# Altium PCB PB10033E1.PcbDoc (part 2 of 2)
Units mm, origin at the board's own origin, x right, y up, seen from the top; angles counter-clockwise.
Board outline 75 x 46 mm, 2 copper layers (Top Layer, Bottom Layer); 199 components, 69 nets, 439 pads, 161 vias.
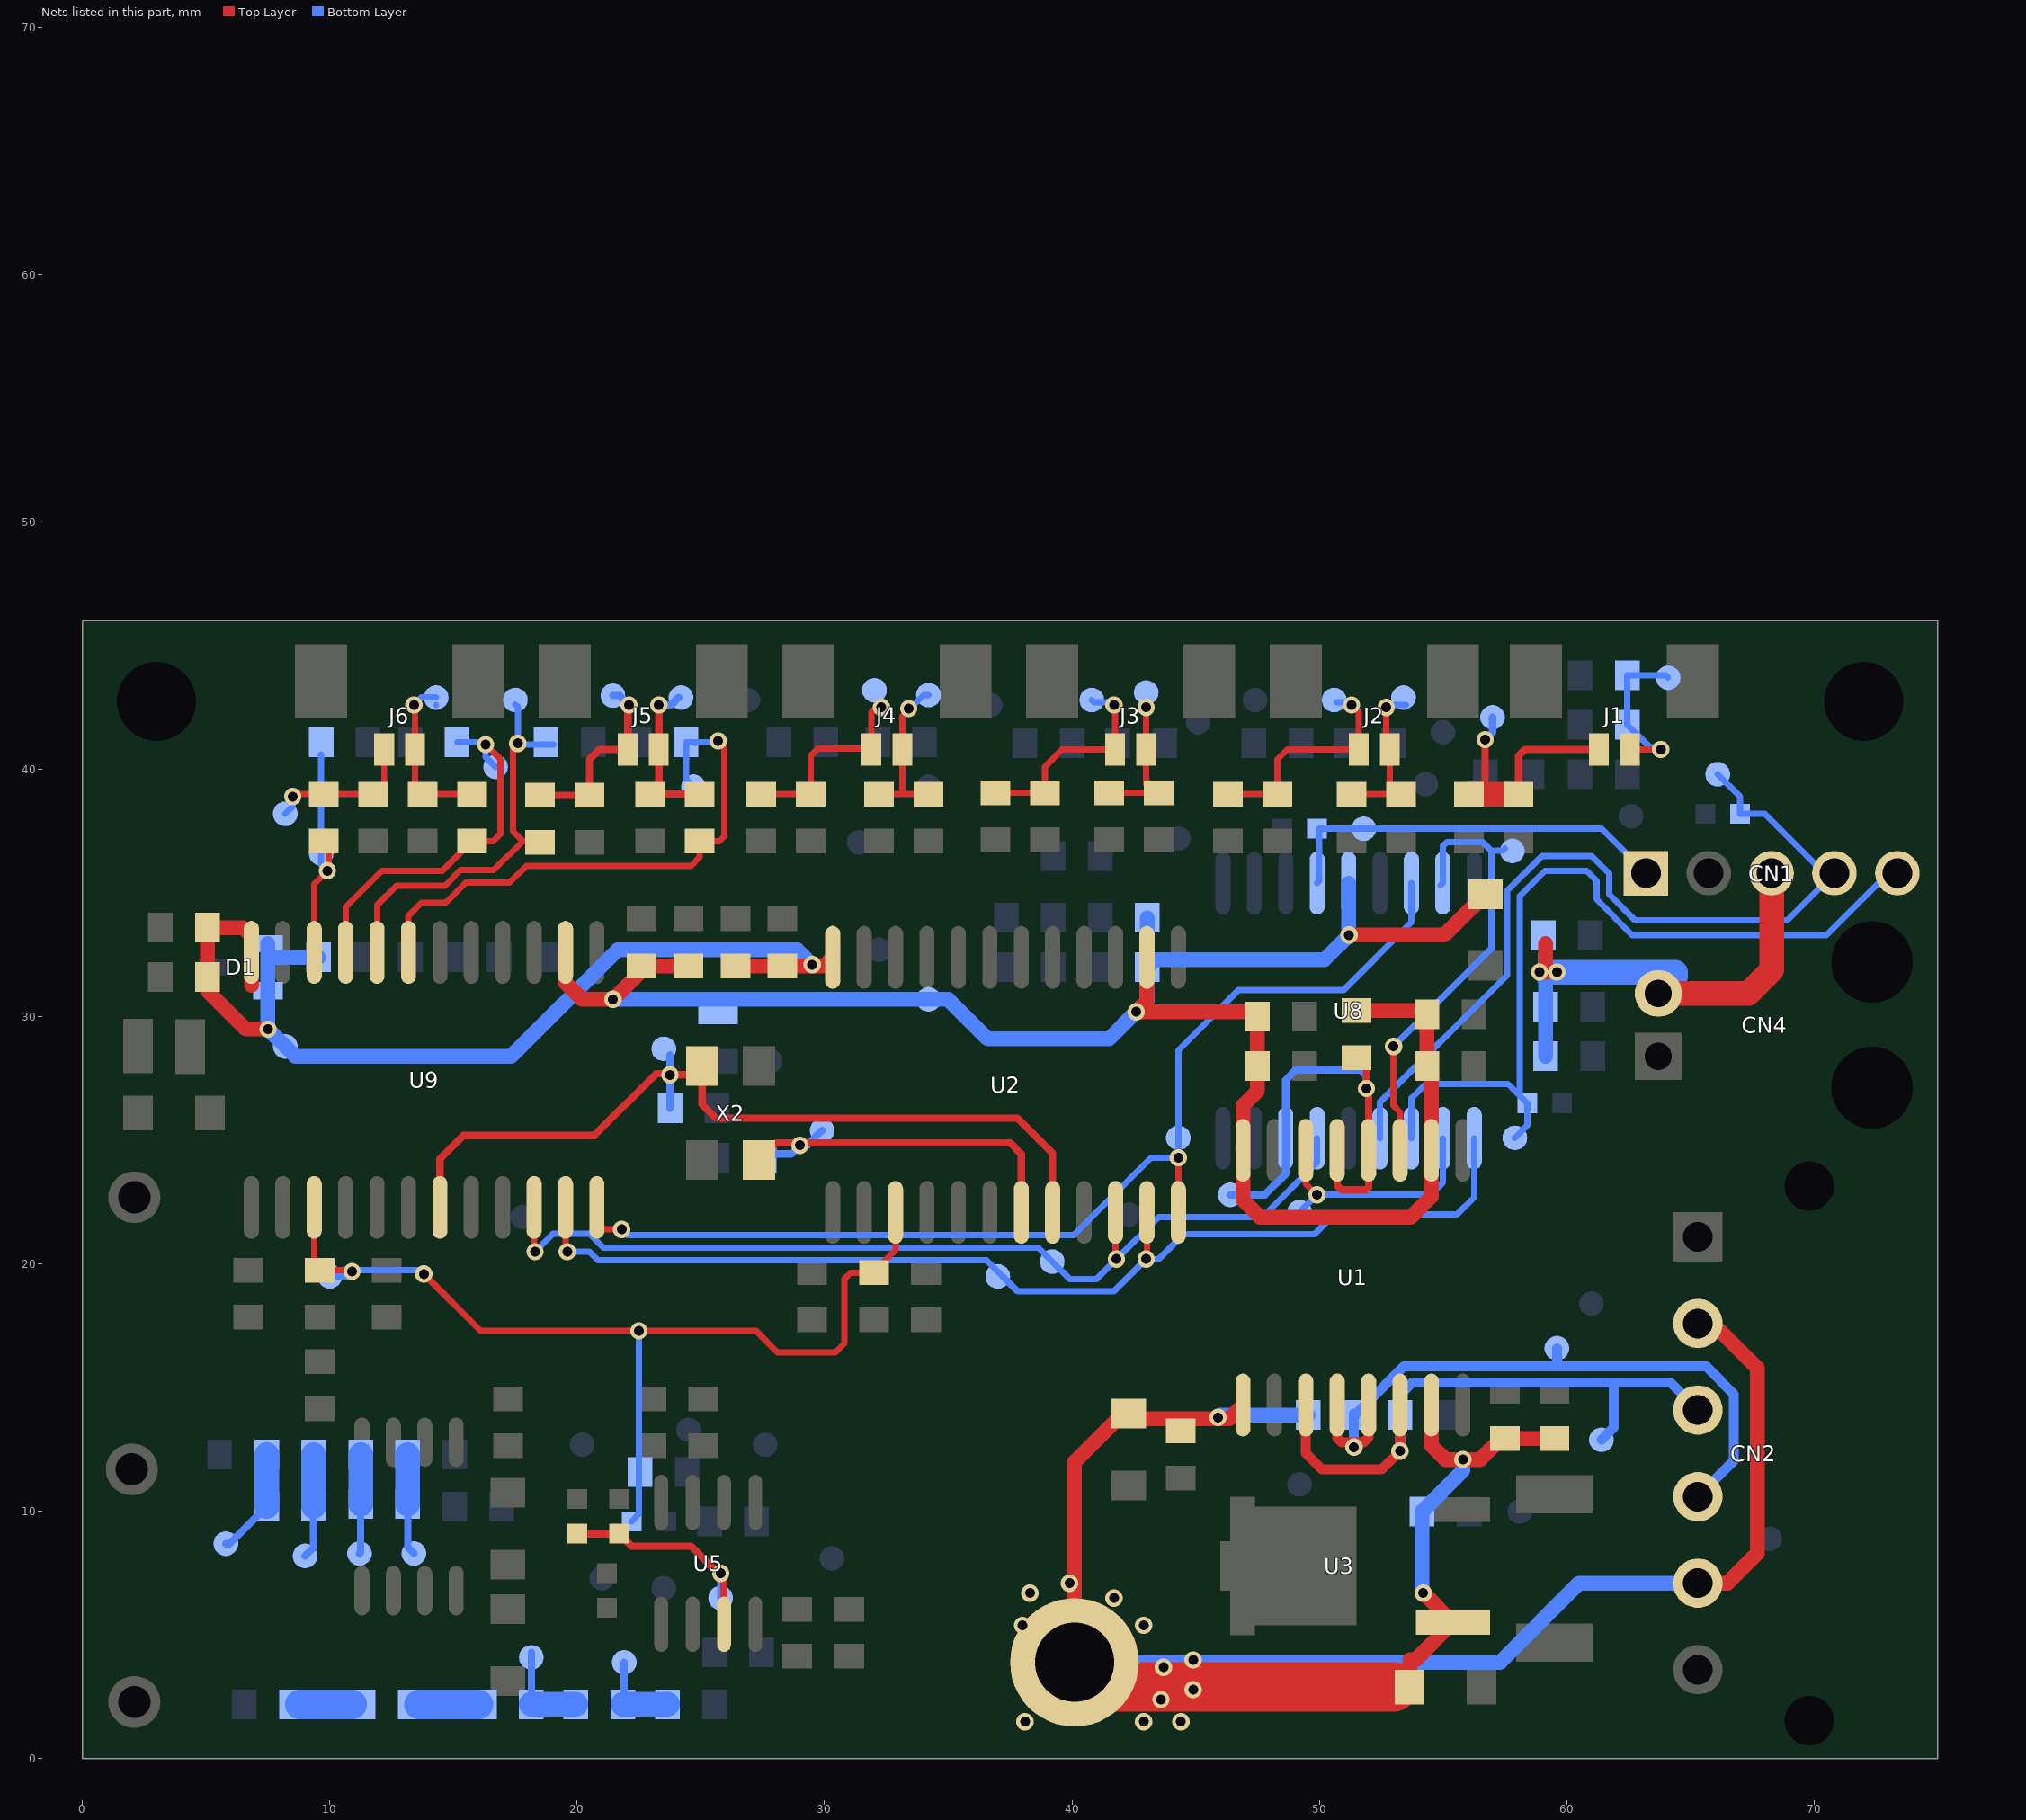
[diagram p2: the nets of this part, all layers, seen from the top]

## Via types
v1: diameter 0.7, hole 0.4, Top Layer to Bottom Layer, 161 vias

## Nets (pads, with @x,y where several pads share a name; then routed paths per layer and width w, separated by ;. In a path a pad name is that pad's centre, name@x,y a point inside that pad or via, vN(x,y) a via of type N, cw(c..) or ccw(c..) an arc to the next point about the centre after c; other vN are vias at no path point) (continued)
NetC51_2: C51.2 ICT282.1 R52.2 U9.7 | length 23.2
  Top Layer w0.254: U9.7@13.18,32.6 13.18,34.074 13.706,34.6 14.682,34.6 15.498,35.416 17.268,35.416 17.95,36.098 18.998,36.098 19,36.1 24.6,36.1 24.95,36.45 R52.2@24.95,37.1 25.75,37.1 25.95,37.3 25.95,40.9 v1(25.7,41.15)
  Bottom Layer w0.254: ICT282.1@24.7,39.3 24.4,39.6 C51.2@24.4,41.1 C51.2@24.8,41.1 ; C51.2@24.75,41.05 C51.2@24.8,41.1 ; v1@25.65,41.1 C51.2@24.8,41.1
NetC55_2: C55.2 ICT283.1 R65.2 U9.8 | length 16.8
  Top Layer w0.254: U9.8@11.91,32.6 11.91,34.51 12.7,35.3 14.663,35.3 15.287,35.924 16.624,35.924 17.8,37.1 ; v1(17.6,41.05) 17.4,40.85 17.4,37.5 17.8,37.1 ; R65.2@18.5,37.05 18.45,37.1 17.8,37.1
  Bottom Layer w0.254: ICT283.1@17.5,42.619 17.6,42.519 v1(17.6,41.05) ; v1@17.65,41 C55.2@19.05,41
NetC58_2: C58.2 ICT284.1 R66.2 U9.9 | length 15.4
  Top Layer w0.254: U9.9@10.64,32.6 10.64,34.44 12.1,35.9 14.545,35.9 15.745,37.1 R66.2@15.75,37.1 16.6,37.1 16.892,37.392 16.892,40.408 v1(16.3,41)
  Bottom Layer w0.254: C58.2@15.15,41.1 16.2,41.1 v1(16.3,41) 16.3,40.5 ICT284.1@16.7,40.1
NetC59_2: C59.2 ICT285.1 R69.2 U9.10 | length 9.4
  Top Layer w0.254: U9.10@9.37,32.6 9.37,35.37 v1(9.9,35.9) ; v1@9.95,36.05 R69.2@9.95,37.1
  Bottom Layer w0.254: C59.2@9.65,40.6 9.65,36.15 v1(9.9,35.9)
NetC60_1: C60.1 ICT286.1 U2.19 X2.3 | length 16.2
  Top Layer w0.3: X2.3@27.35,24.2 28.05,24.9 37.5,24.9 37.95,24.45 U2.19@37.95,22.088
  Bottom Layer w0.3: C60.1@27.5,24.45 28.65,24.45 v1(29,24.8) 29.3,24.8 ICT286.1@29.9,25.4
NetC62_1: C62.1 ICT290.1 U2.20 U9.19 X2.1 | length 35.1
  Top Layer w0.3: U9.19@14.45,22.288 14.45,24.25 15.4,25.2 20.7,25.2 23.2,27.7 23.7,27.7 v1(23.75,27.65) 25,27.65 X2.1@25.05,27.7 ; X2.1@25.05,28 X2.1@25.05,27.7 ; U2.20@39.22,22.088 39.22,24.48 37.8,25.9 25.6,25.9 25.05,26.45 X2.1@25.05,27.7
  Bottom Layer w0.3: C62.1@23.75,26.3 v1(23.75,27.65) ICT290.1@23.75,28.45
NetCN1_1: CN1.1 ICT291.1 R5.2 U8.4 | length 21.2
  Bottom Layer w0.254: U8.4@49.91,35.4 50,35.49 50,37.6 ICT291.1@51.8,37.6 ; 56.769,37.6 ICT291.1@51.8,37.6 ; CN1.1@63.2,35.8 61.4,37.6 ICT291.1@51.8,37.6
NetCN1_4: CN1.4 ICT292.1 R6.2 U8.13 | length 35.1
  Bottom Layer w0.254: U8.13@52.45,25.088 52.45,26.55 ; 52.45,26.542 57.592,31.684 57.592,35.092 59,36.5 61,36.5 61.718,35.782 61.718,34.943 62.761,33.9 68.92,33.9 CN1.4@70.82,35.8 70.4,35.8 68,38.2 R6.2@67,38.2 67,38.9 ICT292.1@66.1,39.8
NetCN1_5: CN1.5 ICT293.1 R4.2 U8.12 | length 36.4
  Bottom Layer w0.254: 53.72,26.709 U8.12@53.72,25.088 53.72,26.7 54.294,27.274 57.626,27.274 R4.2@58.1,26.8 ; ICT293.1@57.9,25.1 58.4,25.6 R4.2@58.4,26.5 R4.2@58.1,26.8 ; CN1.5@73.36,35.8 73,35.8 70.5,33.3 62.643,33.3 61.2,34.743 61.2,35.5 60.8,35.9 59.118,35.9 58.1,34.882 R4.2@58.1,26.8
NetCN2_3: CN2.3 ICT294.1 R1.2 U1.11 U1.14 | length 26.4
  Top Layer w0.4: U1.11@49.45,14.3 49.45,12.35 50.1,11.7 52.52,11.7 v1(53.26,12.44) U1.14@53.26,14.3
  Bottom Layer w0.4: R1.2@53.25,13.9 53.25,14.6 ; v1(53.26,12.44) 53.26,14.59 53.25,14.6 ; ICT294.1@61.4,12.9 61.9,13.4 61.9,15.204 ; CN2.3@65.3,14.1 64.196,15.204 61.9,15.204 ; 53.25,14.6 53.25,14.696 53.758,15.204 61.9,15.204
NetCN2_4: CN2.4 ICT295.1 R2.1 U1.12 U1.13 | length 28.5
  Top Layer w0.4: U1.12@50.72,14.3 50.72,12.98 50.9,12.8 v1@51.4,12.8 ; v1(51.4,12.6) v1@51.4,12.8 ; U1.13@51.99,14.3 51.99,12.99 51.8,12.8 v1@51.4,12.8
  Bottom Layer w0.4: v1(51.4,12.6) R2.1@51.4,13.95 ; R2.1@51.45,13.9 53.408,15.858 59.6,15.858 ; ICT295.1@59.6,16.6 59.6,15.858 ; CN2.4@65.3,10.6 66.754,12.054 66.754,14.746 65.642,15.858 ; 66.2,15.3 65.642,15.858 ; 59.6,15.858 65.642,15.858
NetJ1_1: ICT296.1 J1.1 R11.1 R12.1 | length 7.5
  Top Layer w0.254: J1.1@62.55,40.8 v1@63.7,40.8
  Bottom Layer w0.254: 63.05,41.2 R11.1@62.45,41.8 ; v1(63.8,40.8) 63.7,40.9 63.35,40.9 R11.1@62.45,41.8 ; ICT296.1@64.1,43.7 64,43.8 R12.1@62.45,43.8 R11.1@62.45,41.8
NetJ1_2: ICT297.1 J1.2 R13.1 R14.1 | length 10.7
  Top Layer w0.254: R13.1@58.05,39 R13.1@58.25,39.2
  Top Layer w0.3: 56.7,39 v1(56.7,41.2) ; 57.3,39.1 57.4,39 ; R13.1@58.05,39 58.05,40.55 58.3,40.8 J1.2@61.45,40.8
  Top Layer w1: R14.1@56.05,39 56.7,39 57.4,39 R13.1@58.05,39
  Bottom Layer w0.3: v1(56.7,41.2) 57,41.5 ICT297.1@57,42.1
NetJ2_1: ICT298.1 J2.1 R15.1 R16.1 | length 6.7
  Top Layer w0.254: R16.1@51.3,39 R15.1@53.3,39 52.85,39.45 J2.1@52.85,40.8 52.7,40.95 v1(52.7,42.5)
  Bottom Layer w0.254: v1@52.7,42.4 v1(52.7,42.5) 52.8,42.6 ICT298.1@53.5,42.6
NetJ2_2: ICT299.1 J2.2 R18.1 R19.1 | length 9.4
  Top Layer w0.254: R19.1@46.3,39 R18.1@48.3,39 48.3,40.4 48.7,40.8 J2.2@51.6,40.8 51.6,42.3 v1(51.3,42.6)
  Bottom Layer w0.254: ICT299.1@50.7,42.7 51.2,42.7 v1(51.3,42.6)
NetJ3_1: ICT300.1 J3.1 R20.1 R22.1 | length 6.5
  Top Layer w0.254: R22.1@41.2,39 R22.1@41.4,39 ; R22.1@41.5,39.05 43.35,39.05 43,39.4 R20.1@43,39.55 ; v1@43,42.6 J3.1@43,40.8 R20.1@43,39.55 ; R20.1@43.5,39.05 R20.1@43,39.55
  other v1: 43,42.5
NetJ3_2: ICT301.1 J3.2 R24.1 R25.1 | length 9.2
  Top Layer w0.254: R25.1@36.9,39.05 R24.1@38.9,39.05 38.9,40.1 39.6,40.8 J3.2@41.75,40.8 41.75,42.65 v1(41.7,42.6)
  Bottom Layer w0.254: ICT301.1@40.8,42.8 40.9,42.7 41.5,42.7 41.7,42.5 v1(41.7,42.6)
NetJ4_1: ICT288.1 J4.1 R46.1 R47.1 | length 7.1
  Top Layer w0.254: R47.1@31.95,39 R47.1@32.2,39 33.1,39 ; v1(33.4,42.45) 33.4,42.4 33.15,42.15 J4.1@33.15,40.8 33.15,39.05 33.1,39 ; R46.1@34.35,39.15 R46.1@34.2,39 33.1,39
  Bottom Layer w0.254: v1(33.4,42.45) 33.4,42.4 34,43 ICT288.1@34.2,43
NetJ4_2: ICT302.1 J4.2 R48.1 R49.1 | length 8.4
  Top Layer w0.254: R49.1@27.442,39 R48.1@29.442,39 ; R48.1@29.45,39 R48.1@29.442,39 ; v1(32.3,42.5) 32.1,42.5 31.9,42.3 J4.2@31.9,40.8 31.869,40.831 29.731,40.831 29.442,40.542 R48.1@29.442,39
  Bottom Layer w0.254: v1@32.2,42.6 v1(32.3,42.5) v1@32.4,42.5
NetJ5_1: ICT322.1 J5.1 R52.1 R55.1 | length 6.7
  Top Layer w0.3: v1(23.3,42.6) J5.1@23.3,40.8 23.3,39.35 R55.1@22.95,39 R52.1@24.95,39
  Bottom Layer w0.3: v1(23.3,42.6) 23.8,42.6 ICT322.1@24.1,42.9
NetJ5_2: ICT303.1 J5.2 R64.1 R65.1 | length 7.9
  Top Layer w0.3: R65.1@18.5,38.95 R64.1@20.5,38.95 20.5,40.4 20.9,40.8 J5.2@22.05,40.8 22.05,42.65 v1(22.1,42.6)
  Bottom Layer w0.3: ICT303.1@21.445,42.978 21.722,42.978 v1(22.1,42.6)
NetJ6_1: ICT304.1 J6.1 R66.1 R67.1 | length 6.8
  Top Layer w0.254: v1(13.4,42.6) 13.45,42.55 J6.1@13.45,40.8 13.45,39.3 R67.1@13.75,39 R66.1@15.75,39
  Bottom Layer w0.254: v1(13.4,42.6) 13.7,42.9 ICT304.1@14.3,42.9
NetJ6_2: ICT305.1 J6.2 R68.1 R69.1 | length 6.1
  Top Layer w0.254: v1(8.5,38.9) 8.6,39 R69.1@9.75,39 R68.1@11.75,39 12.2,39.45 J6.2@12.2,40.8
  Bottom Layer w0.254: ICT305.1@8.2,38.2 8.5,38.5 v1(8.5,38.9)
NetR8_2: ICT321.1 R8.2 R9.2 U5.3 | length 9.5
  Top Layer w0.3: R8.2@20,9.1 R9.2@21.7,9.1 22.2,8.6 24.6,8.6 25.935,7.265 U5.3@25.935,5.436
  Bottom Layer w0.3: v1@25.7,7.4 25.8,7.4 ICT321.1@25.8,6.5
  other v1: 25.8,7.5
NetR26_2: ICT306.1 R26.2 R27.1 | length 4.4
  Bottom Layer w0.3: ICT306.1@5.8,8.7 5.95,8.7 R27.1@7.45,10.2
  Bottom Layer w1: R27.1@7.45,10.2 R26.2@7.45,12.3
NetR27_2: ICT307.1 R27.2 R28.1 | length 4.2
  Bottom Layer w0.3: ICT307.1@9,8.2 9.35,8.55 R27.2@9.35,10.2
  Bottom Layer w1: R27.2@9.35,10.2 R28.1@9.35,12.3
NetR28_2: ICT308.1 R28.2 R29.1 | length 4
  Bottom Layer w0.3: ICT308.1@11.2,8.3 11.25,8.35 R29.1@11.25,10.3
  Bottom Layer w1: R29.1@11.25,10.3 R28.2@11.25,12.3
NetR29_2: ICT319.1 R29.2 R30.1 | length 4.1
  Bottom Layer w0.3: R29.2@13.15,10.3 13.15,8.55 ICT319.1@13.4,8.3
  Bottom Layer w1: R29.2@13.15,10.3 R30.1@13.15,12.3
NetR39_2: ICT324.1 R39.2 R40.1 | length 2.1
  Bottom Layer w1.2: R39.2@8.8,2.2 R40.1@10.9,2.2
NetR40_2: ICT325.1 R40.2 R41.1 | length 2.4
  Bottom Layer w1.2: R40.2@13.6,2.2 R41.1@16,2.2
NetR41_2: ICT326.1 R41.2 R42.1 | length 3.9
  Bottom Layer w0.3: R41.2@18.15,2.2 ICT326.1@18.15,4.3
  Bottom Layer w1: R41.2@18.15,2.2 R42.1@19.95,2.2
NetR42_2: ICT327.1 R42.2 R43.1 | length 3.5
  Bottom Layer w0.3: R42.2@21.85,2.2 21.9,2.25 ICT327.1@21.9,3.9
  Bottom Layer w1: R42.2@21.85,2.2 R43.1@23.65,2.2
PGND: *3.1 C1.1 C2.1 C4.2 C7.2 C24.2 C26.1 CN2.2 CN2.5 R2.2 U1.9 U1.15 U3.1 | length 92.4
  Top Layer w0.6: *3.1@41.1,2.9 *3.1@40.1,3.9 40.1,12 41.85,13.75 46.36,13.75 U1.9@46.91,14.3 ; C2.1@53.3,2.6 C2.1@53.65,2.6 ; C2.1@53.65,2.9 53.65,4 53.885,4 U3.1@55.4,5.515 54.215,6.7 v1(54.2,6.7) ; U1.15@54.53,14.3 54.53,12.67 55.1,12.1 v1(55.8,12.1) 56.5,12.1 57.35,12.95 C24.2@57.5,12.95 C26.1@59.5,12.95 ; CN2.5@64.6,7.1 66.5,7.1 67.7,8.3 67.7,15.8 65.9,17.6 CN2.2@64.6,17.6
  Top Layer w2: *3.1@41.1,2.9 53,2.9
  Bottom Layer w0.6: *3.1@40.1,3.9 57.3,3.9 60.5,7.1 CN2.5@64.6,7.1 ; v1(45.9,13.8) 46,13.9 R2.2@49.55,13.9 ; v1(54.2,6.7) 54.15,6.75 C7.2@54.15,10 55.8,11.65 v1(55.8,12.1)
  other v1: 38.1,1.5 42.9,1.5 44.4,1.5 43.6,2.4 44.9,2.8 43.7,3.7 44.9,4 38,5.4 42.9,5.4 41.7,6.5 38.3,6.7 39.9,7.1
RS485EN: ICT310.1 R3.1 U1.4 U1.5 U8.16 | length 18.7
  Top Layer w0.3: U1.5@50.72,24.6 50.72,23.18 50.9,23 51.9,23 51.99,23.09 U1.4@51.99,24.6 51.99,27.01 v1(51.9,27.1) 51.9,27.95 R3.1@51.5,28.35
  Bottom Layer w0.3: ICT310.1@46.4,22.8 47.8,22.8 48.64,23.64 U8.16@48.64,25.088 48.64,27.44 49.054,27.854 51.646,27.854 51.9,27.6 v1(51.9,27.1)
RX: ICT320.1 U1.3 U8.8 | length 18.2
  Top Layer w0.254: v1(53,28.8) 53,26.4 53.26,26.14 U1.3@53.26,24.6
  Bottom Layer w0.254: v1(53,28.8) 56.946,32.746 56.946,36.705 ; U8.8@54.9,35.31 U8.8@54.99,35.4 54.99,36.89 55.151,37.051 56.6,37.051 56.946,36.705 ; ICT320.1@57.5,36.8 57.405,36.705 56.946,36.705
SCK1: ICT311.1 U2.23 U8.10 U9.23 | length 44.9
  Top Layer w0.254: v1@19.53,20.57 U9.23@19.53,22.288 ; v1(43,20.2) 43.03,20.23 U2.23@43.03,22.088
  Bottom Layer w0.254: v1(19.6,20.5) 20.5,20.5 20.839,20.161 36.539,20.161 37.808,18.892 41.692,18.892 v1(43,20.2) 43.5,20.2 44.5,21.2 49.8,21.2 50.6,22 55.56,22 56.26,22.7 U8.10@56.26,25.088
SDI1: ICT312.1 U2.24 U8.7 U9.24 | length 45.3
  Top Layer w0.254: U9.24@20.8,22.288 20.8,21.7 21.1,21.4 v1(21.8,21.4) ; U2.24@44.3,22.088 v1(44.3,24.3)
  Bottom Layer w0.254: v1(21.8,21.4) 22.023,21.177 40.077,21.177 43.2,24.3 v1(44.3,24.3) ICT312.1@44.3,25.1 44.3,28.649 46.72,31.069 50.969,31.069 53.72,33.82 U8.7@53.72,35.4
SDO1: ICT313.1 U2.22 U8.15 U9.22 | length 39.7
  Top Layer w0.254: v1@18.26,20.34 U9.22@18.26,22.288 ; v1@41.76,20.16 U2.22@41.76,22.088
  Bottom Layer w0.254: v1(18.3,20.5) 19.031,21.231 20.5,21.231 21.062,20.669 38.631,20.669 ICT313.1@39.2,20.1 39.9,19.4 41,19.4 v1(41.8,20.2) ; v1@41.8,20.382 v1(41.8,20.2) ; U8.15@49.91,25.088 49.91,24.11 47.7,21.9 43.5,21.9 v1(41.8,20.2)
TX: ICT314.1 U1.6 U8.11 | length 10.1
  Top Layer w0.254: U1.6@49.45,24.6 49.45,23.25 v1(49.9,22.8)
  Bottom Layer w0.254: ICT314.1@49.2,22.1 v1(49.9,22.8) 54.5,22.8 54.99,23.29 U8.11@54.99,25.088
VBC: C35.2 C63.2 ICT315.1 R7.2 R17.2 U2.15 U9.15 | length 41.2
  Top Layer w0.254: U9.15@9.37,22.288 9.37,19.82 9.3,19.75 C63.2@9.6,19.75 v1@10.65,19.75 ; v1(13.8,19.6) 16.1,17.3 v1(22.5,17.3) 27.231,17.3 28.1,16.431 30.435,16.431 30.8,16.796 30.8,19.4 31.05,19.65 C35.2@31.95,19.65 ; C35.2@32,19.65 C35.2@31.95,19.65 ; U2.15@32.87,22.088 32.87,20.57 C35.2@31.95,19.65
  Bottom Layer w0.254: ICT315.1@10,19.5 10.7,19.5 v1(10.9,19.7) v1@10.9,19.75 ; v1@10.719,19.569 v1@10.9,19.75 ; v1@13.85,19.75 v1@10.9,19.75 ; R17.2@22.2,9.6 22.5,9.9 v1(22.5,17.3)
VREF: C20.2 C21.2 C56.2 C57.2 D1.2 D1.3 ICT317.1 R32.1 U2.12 U9.12 | length 43.1
  Top Layer w0.6: C57.2@5.05,33.1 C56.2@5.05,31.6 5.05,31.05 6.6,29.5 v1(7.5,29.5) ; C57.2@5.05,33.6 6.5,33.6 6.83,33.27 U9.12@6.83,32.6 6.83,31.27 ; C20.2@26.4,32.05 29.98,32.05 U2.12@30.33,32.4
  Bottom Layer w0.6: D1.3@7.5,32.95 7.5,32.4 ; R32.1@9.55,32.4 7.5,32.4 ; v1(29.5,32.1) 28.9,32.7 21.633,32.7 17.333,28.4 8.6,28.4 ICT317.1@8.2,28.8 v1(7.5,29.5) D1.2@7.5,31.05 7.5,32.4
VSS: B2.1 C3.2 C5.2 C8.1 C9.2 C10.1 C17.2 C18.2 C27.2 C28.2 C53.2 C54.2 CN1.3 CN4.2 ICT318.1 R3.2 R23.2 U1.2 U1.8 U2.2 U8.5 U9.2 | length 104.6
  Top Layer w0.6: U9.2@19.53,32.6 19.53,31.37 20.2,30.7 v1(21.45,30.7) 22.6,31.85 C53.2@22.6,32.05 ; C53.2@22.9,32.05 C54.2@24.5,32.05 C54.2@24.7,32.05 ; U2.2@43.03,32.4 43.03,30.63 v1(42.6,30.2) 47.3,30.2 C5.2@47.5,30 C3.2@47.5,28 47.5,27 46.91,26.41 U1.8@46.91,24.6 ; U1.8@46.9,24.61 U1.8@46.91,24.6 ; v1(51.2,33.3) 55.05,33.3 C8.1@56.7,34.95 C8.1@56.8,34.85 ; R3.2@51.5,30.25 54.2,30.25 C27.2@54.35,30.1 C28.2@54.35,28 54.53,27.82 U1.2@54.53,24.6 54.53,22.73 53.696,21.896 47.604,21.896 46.91,22.59 U1.8@46.91,24.6 ; v1@59.15,31.8 59.15,32.95
  Top Layer w1: CN4.2@63.7,30.94 67.34,30.94 68.28,31.88 CN1.3@68.28,35.8
  Bottom Layer w0.6: v1(21.45,30.7) ICT318.1@34.2,30.7 35,30.7 36.6,29.1 41.5,29.1 v1(42.6,30.2) 43.05,30.65 C17.2@43.05,32 ; C18.2@43.05,34 C17.2@43.05,32 ; U8.5@51.18,35.4 51.18,33.32 v1(51.2,33.3) 50.204,32.304 43.354,32.304 C17.2@43.05,32 ; C9.2@59.15,28.4 C10.1@59.15,30.4 59.15,31.8 59.15,32.5
  Bottom Layer w1: v1@59.15,31.8 v1(59.6,31.8) 64.4,31.8 64.4,31.64 CN4.2@63.7,30.94
  other v1: 58.9,31.8
pads on no net: *1.1 *2.1 CN2.0 CN4.0 J1.0 J2.0 J3.0 J4.0 J5.0 J6.0 U1.7 U1.10 U2.1 U2.17 U2.18 U4.1 U4.6 U4.7 U5.1 U5.5 U5.8 U8.1 U8.2 U8.3 U8.17 U8.18 U9.1 U9.17 U9.18 U9.20 X2.2 X2.4

## Polygon pours and split planes (outlines as drawn)
AGND on Bottom Layer "Bottom Layer-No Net" (solid, remove dead copper, pour order 27): 3.6,25.4 4,25 4,19.5 6.3,17.2 14,17.2 16.4,14.8 16.4,9.6 16.6,9.4 25.3,9.4 26.9,7.8 26.9,3.3 27.8,2.4 30.6,2.4 31.5,3.3 31.5,13.1 34.9,16.5 34.9,18.8 33.8,19.9 16.8,19.9 15.9,20.8 10.7,25.4
3.3V on Bottom Layer "Bottom Layer-No Net" (solid, remove dead copper, pour order 38): 45.3,5.8 43.6,7.5 43.6,11.2 44,11.6 52.7,11.6 52.9,11.4 52.9,6.1 52.6,5.8
PGND on Bottom Layer "Bottom Layer-No Net" (solid, remove dead copper, pour order 46): 62.1,5.6 65.5,5.6 66,6.1 66,8.2 65.5,8.7 59,8.7 55.5,5.2 44.9,5.2 44.2,5.9 43.9,5.6 41.9,5.6 41.9,3.4 43.5,1.8 43.2,0.9 57.4,0.9
VSS on Bottom Layer "Bottom Layer-No Net" (solid, remove dead copper, pour order 27): 21,31.1 21,30.5 21,30.394 21.45,29.944 21.694,29.7 25.2,29.7 26.8,29.7 27.3,30.2 27.4,30.3 28.6,30.3 34.3,30.3 35.9,28.7 36.2,28.4 40.9,28.4 42,28.4 44.3,30.7 45.5,31.9 49.3,31.9 50.4,31.9 51.7,33.2 51.7,35.3 51.7,36.4 51.4,36.7 51.1,36.7 50.9,36.7 50.8,36.6 50.8,36.3 50.8,33.9 49.8,32.9 49.6,32.7 44.6,32.7 44.5,32.7 44.1,33.1 43.8,33.4 43.8,34.1 43.8,34.5 43.6,34.7 43.3,34.7 42.5,34.7 42.4,34.6 42.4,34.1 42.4,30.7 41.5,29.8 41.3,29.6 39.7,29.6 37,29.6 35.5,31.1 35,31.6 22.3,31.6 21.4,31.6 21,31.2 21,31
5VF on Bottom Layer "Bottom Layer-No Net" (solid, remove dead copper, pour order 29): 41.6,29.9 40.8,29.9 40.6,30.1 40.6,34.5 40.7,34.6 41.15,35 41.15,35.6 41.6,35.8 41.8,35.8 44,38 48.9,38 48.9,37.2 44.9,37.2 44.3,36.6 44.3,35.9 44.9,35.3 44.9,34.2 45.4,33.7 46,33.7 46.1,33.6 46.1,33 46,32.9 44.9,32.9 44,33.8 44,35.1 43.7,35.4 42.9,35.4 41.7,34.2 41.7,30
3.3V on Bottom Layer "Bottom Layer-No Net" (solid, remove dead copper, pour order 32): 45.8,10.5 47.3,10.5 52,10.5 53.2,10.5 54.1,11.4 55.9,13.2 55.9,13.6 56.1,13.8 56.4,13.8 61.2,13.8 61.3,13.9 61.3,14.3 61.3,14.7 61.1,14.9 60.8,14.9 60.5,14.6 54.7,14.6 54.6,14.5 54.6,14.2 54.6,13 53.2,11.6 48.3,11.6 45.8,11.6 45.6,11.4 45.6,11.1 45.6,10.6 45.7,10.5
NetC7_1 on Bottom Layer "Bottom Layer-No Net" (solid, remove dead copper, pour order 35): 55.5,10.6 56.6,10.6 56.7,10.5 56.7,10.1 56.7,8.7 56.5,8.5 56.4,8.4 56.1,8.4 55.8,8.4 55.7,8.5 55.5,8.7 55.5,9.5 55.5,10.5 55.6,10.6
PGND on Bottom Layer "Bottom Layer-No Net" (solid, remove dead copper, pour order 43): 55.7,12.5 55.6,12.5 54.8,11.7 53.4,10.3 53.4,7.4 53.4,6.6 53.8,6.2 54.5,6.2 54.7,6.2 54.8,6.3 54.8,6.7 54.8,10.4 55.5,11.1 56.3,11.9 56.3,12.2 56.3,12.4 56.2,12.5 55.6,12.5
12V on Bottom Layer "Bottom Layer-No Net" (solid, remove dead copper, pour order 50): 63.6,2.4 63.9,2.4 67,2.4 68.8,4.2 69.4,4.8 69.4,7.4 69.4,20.3 67.6,22.1 64.3,22.1 63.8,22.1 63.5,21.8 63.4,21.7 63.4,21 63.4,20.3 63.7,20 63.9,19.8 64.9,19.8 65.9,19.8 66.1,19.6 66.5,19.2 66.5,18.3 66.5,5 66.1,4.6 64.2,4.6 63.6,4.6 63.5,4.5 63.4,4.4 63.4,3.6 63.4,2.6 63.6,2.4
PGND on Bottom Layer "Bottom Layer-No Net" (solid, remove dead copper, pour order 42): 37.6,0.9 43.2,0.9 44.2,1.9 44.2,5.9 42.3,7.8 39.3,7.8 37.1,5.6 37.2,1.9 37.2,1.3
VSS on Bottom Layer "Bottom Layer-No Net" (solid, remove dead copper, pour order 44): 58.6,27.7 58.4,27.9 58.4,33.6 58.6,33.8 59.7,33.8 59.8,33.7 59.8,32.5 60.2,32.1 64.4,32.1 64.9,31.6 64.9,30.3 64.5,29.9 63.5,29.9 61.9,31.5 59.8,31.5 59.7,31.4 59.7,27.8 59.6,27.7
AGND on Bottom Layer "Bottom Layer-No Net" (solid, remove dead copper, pour order 48): 61.5,32.6 60.5,32.6 60.5,33.2 60.5,33.3 60.5,33.4 59.5,34.4 59.2,34.7 59.2,35.2 59.4,35.4 60.2,35.4 60.6,35.4 60.8,35.2 60.8,35 60.8,34.6 61.6,33.8 61.6,33.5 61.6,32.6
5VF on Bottom Layer "Bottom Layer-No Net" (solid, remove dead copper, pour order 45): 60.5,31 60.5,27.6 60.7,27.8 62.1,27.8 62.4,27.5 64.7,27.5 64.8,27.6 64.8,29.2 64.6,29.4 62.5,29.4 61.8,30.1 61.8,30.8 61.6,31
AGND on Bottom Layer "Bottom Layer-No Net" (solid, remove dead copper, pour order 31): 59.7,36.6 59.7,37.6 59.6,37.7 59.3,38 53.1,38 52.5,38.6 44.1,38.6 42.5,37 43.1,25.4 43.1,20.2 8.8,20.2 3.6,25.4 3.6,34.8 3.8,35 7.8,35 10.3,37.5 10.3,44 11.1,44.8 60.6,44.8 61.3,44.1 61.3,36.6 61.2,36.5 59.8,36.5
AGND on Top Layer "Bottom Layer-No Net" (solid, remove dead copper, pour order 33): 11.1,44.8 9.3,43 9.3,36.5 8,35.2 3.1,35.2 2.3,34.4 2.3,31.3 3.7,29.9 3.7,25.5 5.7,25.5 6,23.2 6,21.5 6.6,20.9 27.9,20.9 32.3,16.5 32.9,16.5 33.1,16.7 33.1,18.3 31,20.4 31,23 31.5,23.5 42.6,23.5 43.2,24.1 43.2,28.7 41.9,30 41.9,35.7 42.5,36.3 57.6,36.3 59.6,34.3 60.5,34.3 61.1,34.9 61.1,44.5 60.8,44.8
AGND on Top Layer "Bottom Layer-No Net" (solid, remove dead copper, pour order 29): 31.7,2 31,1.3 8.8,1.3 8.4,1.7 8.4,13.5 7.3,14.6 5.9,16 5.9,18.2 3.7,20.4 3.7,27.9 4,27.9 5.8,26.1 6.3,26.1 6.3,24.793 7.484,23.609 7.413,23.538 7.5,20.4 12,19.8 26.5,19.8 27.9,18.4 34.7,18.4 34.8,18.3 34.8,16.5 31.5,13.2 31.5,1.8 31.4,1.7
3.3V on Top Layer "Bottom Layer-No Net" (solid, remove dead copper, pour order 40): 41.5,11.8 41.6,11.9 47,11.9 47.9,11 51.1,11 51.7,10.4 51.7,4.5 51.6,4.4 46.2,4.4 44.9,5.7 43.8,6.8 43.8,9.8 43.2,10.4 41.6,10.4 41.5,10.5
VSS on Top Layer "Bottom Layer-No Net" (solid, remove dead copper, pour order 26): 24.9,32.6 22.4,32.6 21.9,32.6 21.7,32.4 21.6,32.3 21.6,31.6 21.6,31.4 21.2,31 20.7,31 20.4,31 20,31.4 19.9,31.5 19.9,33 19.9,33.8 19.8,33.9 19.3,33.9 19.2,33.8 19.2,33.4 19.2,30.8 19.6,30.4 19.7,30.3 21.1,30.3 21.6,30.3 22,30.7 22.6,31.3 23.4,31.3 25.1,31.3 25.2,31.4 25.2,31.7 25.2,32.5 25.1,32.6 24.9,32.6
VSS on Top Layer "Bottom Layer-No Net" (solid, remove dead copper, pour order 28): 42.6,33.6 42.6,30.9 42.2,30.5 42.2,30.1 42.2,30 42.2,29.9 42.8,29.3 42.9,29.3 45.9,29.3 46.3,28.9 46.3,24 46.3,22 46.7,21.6 46.9,21.4 50.5,21.4 54.4,21.4 55,22 55,23.9 55,30.7 54.9,30.8 53.5,30.8 50.9,30.8 50.8,30.7 50.8,30 50.8,29.8 51,29.6 52.6,29.6 53.4,29.6 53.6,29.4 53.7,29.3 53.7,28.7 53.7,27.3 54.1,26.9 54.1,25.6 54.1,23 53.6,22.5 53.4,22.3 49.9,22.3 47.9,22.3 47.6,22.6 47.3,22.9 47.3,23.5 47.3,26.1 47.9,26.7 48.1,26.9 48.1,27.7 48.1,30.6 48,30.7 47.8,30.7 43.7,30.7 43.5,30.9 43.4,31 43.4,31.4 43.4,33.6 43.3,33.7 42.9,33.7 42.7,33.7 42.6,33.6
5VF on Top Layer "Bottom Layer-No Net" (solid, remove dead copper, pour order 30): 24.9,34.6 18.4,34.6 18,34.2 17.9,34.1 17.9,31.5 17.9,30.5 18.6,29.8 18.9,29.5 20.5,29.5 21.9,29.5 22.6,30.2 22.9,30.5 24.2,30.5 28.9,30.5 30.4,29 31.2,28.2 34.9,28.2 40.6,28.2 41.6,29.2 41.8,29.4 41.8,30.2 41.8,30.4 42.1,30.7 42.2,30.8 42.2,33.4 42.2,33.5 42,33.7 41.6,33.7 41.5,33.7 41.4,33.6 41.3,33.5 41.3,32.1 41.3,31 40.9,30.6 40.9,29.9 40.9,29.6 40.6,29.3 33.1,29.3 31.5,29.3 30.9,29.9 29.7,31.1 23.1,31.1 22.7,31.1 21.9,30.3 21.8,30.2 20.1,30.2 19.3,30.2 18.9,30.6 18.7,30.8 18.7,31.3 18.7,33.9 18.9,34.1 19,34.2 19.8,34.2 21.2,34.2 21.7,33.7 22,33.4 23.1,33.4 25.1,33.4 25.2,33.5 25.2,34 25.2,34.5 25.1,34.6 24.9,34.6
NetC7_1 on Top Layer "Bottom Layer-No Net" (solid, remove dead copper, pour order 34): 61.1,8.4 61.5,8.8 61.5,11.2 61,11.7 57.3,11.7 56.7,11.1 53.6,11.1 53.2,10.7 53.2,8.6 53.4,8.4
PGND on Top Layer "Bottom Layer-No Net" (solid, remove dead copper, pour order 36): 56.9,7.1 53.5,7.1 53.3,6.9 53,6.6 53,3.4 53,2.2 53.1,2.1 53.9,2.1 54.2,2.1 54.3,2.2 54.3,2.6 54.3,4.5 54.5,4.7 54.6,4.8 55.1,4.8 56.9,4.8 57,4.9 57,6.3 57,7 56.9,7.1
PGND on Top Layer "Bottom Layer-No Net" (solid, remove dead copper, pour order 47): 64.1,5.9 64.3,6.1 65.7,6.1 69.9,6.1 70.6,6.8 71.6,7.8 71.6,14.1 71.6,17.4 69.9,19.1 64.3,19.1 63.7,19.1 63.3,18.7 62.6,18 62.6,8.3 62.6,6.7 63.2,6.1 64.2,6.1
12V on Top Layer "Bottom Layer-No Net" (solid, remove dead copper, pour order 49): 56,2 59.7,2 65.6,2 66.1,2.5 66.1,3.6 66.1,4.6 65.8,4.9 65.4,5.3 63.5,5.3 62.9,5.3 62.5,5.3 61.9,5.9 61.7,6.1 60.6,6.1 57.6,6.1 57.4,5.9 57.4,5.1 57.4,4.8 56.8,4.2 56.4,3.8 56,3.8 55.9,3.8 55.8,3.7 55.8,2.9 55.8,2.2 56,2
PGND on Top Layer "Bottom Layer-No Net" (solid, remove dead copper, pour order 39): 47,12.7 47.3,13 47.3,15.3 47.1,15.5 46.7,15.5 45.8,14.6 40.8,14.6 39.7,13.5 39.7,8.9 37.2,6.4 37.2,1.3 38.2,0.3 44.2,0.3 46.6,2.7 40.8,8.5 40.8,12 41.5,12.7
VSS on Top Layer "Bottom Layer-No Net" (solid, remove dead copper, pour order 41): 51.1,34.1 52.4,34.1 54.3,34.1 55.8,35.6 56.5,35.6 57.5,35.6 59.3,33.8 59.856,33.244 59.856,32.055 59.856,31.436 59.685,31.265 58.646,31.265 58.512,31.4 58.444,31.468 58.444,32.055 58.444,32.956 57.8,33.6 57.1,34.3 56.8,34.3 56.5,34.3 55.4,33.2 54.9,32.7 51,32.7 50.8,32.9 50.8,33.4 50.8,33.9 51,34.1 51.2,34.1
5VF on Top Layer "Bottom Layer-No Net" (solid, remove dead copper, pour order 37): 45.6,33.7 49,33.7 50.5,32.2 55.5,32.2 56.3,33 61.9,33 62.6,33.7 64,33.7 64.8,34.5 64.8,36.4 65.2,36.8 66.4,36.8 66.7,36.5 66.7,34.5 64.5,32.3 62.9,32.3 62,31.4 62,29.9 62.5,29.4 64.8,29.4 64.9,29.3 64.9,27.8 64.6,27.5 58.8,27.5 56.3,25 56.3,23.5 56.1,23.3 55.6,23.3 55.5,23.4 55.5,30.85 54.95,31.4 50.5,31.4 50,30.9 50,27.95 50.5,27.45 50.85,27.45 51.1,27.2 51.1,26.8 51,26.7 49.3,26.7 48.8,27.2 48.8,32 48.2,32.6 45.5,32.6 45.3,32.8 45.3,33.4

## Other copper
Top Layer:
  pour cut-out: 60.5,39.75 59.35,39.75 59.1,39.5 58.8,39.8 56.8,39.8 56.8,40.1 57.2,40.5 57.461,40.239 60.5,40.239
  pour cut-out: 39.9,39.9 40.5,39.9 40.5,38.15 39.9,38.15
  pour cut-out: 21.95,38.1 21.5,38.1 21.4,38.2 21.4,39.9 22.1,39.9 21.95,39.75
  pour cut-out: 18.3,5.05 18.3,3.904 18.196,3.8 16.9,3.8 16.9,4.063 16.087,4.876 16.261,5.05
  pour cut-out: 27.89,9.526 27.89,6.59 27.8,6.5 26.3,6.5 26.3,7.935
  pour cut-out: 27.9,3.25 27.15,3.25 27.1,3.3 27.6,3.8 28,3.8 28,3.35
  pour cut-out: 16.1,7.65 15.8,7.65 15.8,5.341 15.711,5.252 16.463,4.5 16.5,4.5 16.5,5 16.1,5.4
  pour cut-out: 15.726,11.75 16.2,11.75 16.3,11.85 16.3,12.3 15.7,12.3 15.6,12.2 15.726,12.074
  pour cut-out: 26.1,13.55 26.15,13.5 26.423,13.5 26.223,13.3 25.9,13.3 25.9,13.35
  pour cut-out: 22.5,10.3 22.9,10.3 23,10.2 23,9.3 22.766,9.3 22.5,9.566
  pour cut-out: 12.4,15.1 12.6,14.9 16.6,14.9 16.6,13.6 16.7,13.5 12,13.5 11.7,13.8 11.8,13.9 11.8,14.8 12.1,14.8
  pour cut-out: 11.6,15.7 7.1,15.7 8.1,14.7 11,14.7 11.723,15.423 11.723,15.85
  pour cut-out: 7.7,18.05 11.75,18.05 12,18.3 12.25,18.05 13.491,18.05 14.7,16.841 14.7,16.3 14.5,16.1 14.6,16 15.5,16 15.5,16.5 12.25,19.75 7.85,19.75 7.4,19.3 7.7,19
  pour cut-out: 15.9,25.4 16,25.5 28.8,25.5 29.8,24.5 30,24.5 30,24.4 29.376,23.776 29.376,21.123 29.7,20.8 30.7,20.8 29.8,20.6 15.7,20.6 15.165,21.135 15.165,24.765 15.9,25.5
  pour cut-out: 32.84,34.5 32.8,34.54 32.8,35.3 32.4,35.7 33,36.3 34.64,36.3
  pour cut-out: 30.442,39.75 31.1,39.758 51,39.9 51.1,40 50.8,40.3 50.8,40.5 29.9,40.5 29.7,40.3 29.979,40.021 29.979,39.9 30.3,39.9 30.5,39.7
  pour cut-out: 42.088,29.112 43.088,29.112 42.5,29.7 42.1,29.7 42.1,29.123
  pour cut-out: 15.72,23.964 15.72,24.78 15.6,24.9 15.165,24.465 13.932,24.465 13.407,23.94 8.24,23.94 7.9,23.6 15.6,23.6 15.6,23.844
  pour cut-out: 5.6,34.5 6.901,34.5 7.333,34.068 7.071,33.806 5.95,33.806 5.95,34.15
  pour cut-out: 7.536,31.279 7.536,30.136 7.3,29.9 7.2,30 6.5,30 5.7,30.8 5.7,32.4 7,32.4 7.5,31.9
  pour cut-out: 7.834,35.2 8.6,35.2 8.833,35 9.5,34.333 9.5,33.9 10.5,33.9 10.962,34.362 10.962,35.522 10.656,35.827 10.656,35.9 10.75,35.994 10.75,36.2 9,36.2
  pour cut-out: 23.967,29.2 22.743,27.976 22.743,26.682 21.3,25.239 22.961,25.239 23.6,24.6 23.6,23.4 24,23 28.4,23 28.804,23.404 28.804,28.796 28.4,29.2
Bottom Layer:
  pour cut-out: 38.35,35.5 38.35,35 38.7,35 38.594,35.106 38.594,35.5 38.372,35.5 38.35,35.522
  pour cut-out: 59.5,40.8 59.65,40.8 59.65,38.8 59.5,38.8
  pour cut-out: 55.8,38.8 54.4,38.8 55.4,39.8 55.9,39.8 55.9,38.9
  pour cut-out: 57.85,38.1 57.1,38.1 56.9,37.9 57,37.8 57.9,37.8 57.9,38.05
  pour cut-out: 28.586,29.17 28.6,29.156 28.6,23.45 28.45,23.3 24.75,23.3 22.9,25.2 22.9,29.1 23,29.2 23.03,29.17
  pour cut-out: 22.85,27.3 22.85,28.136 21.694,29.292 18.892,29.292 20.4,30.8 20.4,31 20.969,31 23.039,28.929 23.039,27.371 22.969,27.3
  pour cut-out: 18.95,31.4 18.95,31.015 19.335,31.4 18.95,31.4
  pour cut-out: 17.726,30.8 18.3,31.374 18.3,31.6 17.5,31.6 17.4,31.5 17.4,30.8
  pour cut-out: 28.586,28.654 28.586,29.686 28.9,30 24.1,29.7 24.1,28.9 24.346,28.654
  pour cut-out: 55.7,40.05 55.501,40.05 50.2,40.05 50.2,41.2 49.7,41.7 49.723,41.723 49.723,42.565 53.797,42.565 54.386,43.154 56.346,43.154 57.5,42 57.5,40.05 55.7,40.05
  pour cut-out: 43.888,43.254 43.908,43.234 43.908,43.092 44.2,42.8 44.208,42.808 48.3,42.808 48.3,42.4 48.25,40.5 46.9,40.5 46.45,40.05 44.65,40.05 44.65,40.25 43.2,41.7 43.5,42 43.5,43.1 43.734,43.1
  pour cut-out: 34.95,42.1 35.558,42.1 35.823,42.365 37.2,40.988 37.2,40.05 35.576,40.05 35.072,39.546 34.5,40.118 34.5,42 34.85,42
  pour cut-out: 16.05,42.1 25.868,42.1 26.114,42.346 26.5,41.96 26.5,41.7 24.9,40.1 17.608,40.1 16.05,41.658
  pour cut-out: 8.65,33.4 8.5,33.4 6.5,33.4 6.5,29.43 6.965,28.965 7.586,29.586 8.654,29.586 8.654,31.254 8.9,31.5 8.65,31.75
  pour cut-out: 42.05,37.5 42.923,37.5 42.023,36.6 42,36.6 42,37.45
  pour cut-out: 19.3,32.9 19.3,30.9 21,32.6 21,33.1 19.2,33.1 19.2,33

## Silkscreen, mask and mechanical layers (free items; w line width, h text height)
Top Overlay:
  lines w0.2: 0,0 0,46 ; 0,0 75,0 ; 0,0 0,46 ; 0,0 75,0 ; 0,46 75,46 ; 0,46 75,46 ; 75,0 75,46 ; 75,0 75,46
  text "2013/03/21" at 61.925,17.932 h3 r270
  text "PB10033E1" at 68.148,17.755 h3 r270
Bottom Overlay:
  text "L1" at 3.2,24.9 h2
  text "L2" at 3.2,13.7 h2
  text "L3" at 3.2,4.1 h2
Mechanical 1:
  lines w0.2: -7.75,0 -6.25,0 ; -7.75,46 -6.25,46 ; -7.333,1 -7,0 ; -7.333,45 -7,46 ; -7,19.549 -7,0 ; -7,26.451 -7,46 ; -6.667,1 -7,0 ; -6.667,45 -7,46 ; -5.35,0 -3.85,0 ; -5.35,46 -3.85,46 ; -4.933,-1 -4.6,0 ; -4.933,47 -4.6,46 ; -4.6,-2.54 -4.6,0 ; -4.6,6.44 -4.6,3.9 ; -4.6,19.221 -4.6,3.9 ; -4.6,27.379 -4.6,42.7 ; -4.6,40.16 -4.6,42.7 ; -4.6,48.54 -4.6,46 ; -4.267,-1 -4.6,0 ; -4.267,47 -4.6,46 ; -2.54,-1.3 0,-1.3 ; -1,-1.633 0,-1.3 ; -1,-0.967 0,-1.3 ; 0,-7.25 0,-5.75 ; 0,-2.05 0,-0.55 ; 0.5,3.9 35.1,3.9 ; 1,-6.833 0,-6.5 ; 1,-6.167 0,-6.5 ; 3,1.5 3,38 ; 5.54,-1.3 3,-1.3 ; 7.5,42.7 67.5,42.7 ; 17.549,-1.3 3,-1.3 ; 25.551,-1.3 40.1,-1.3 ; 34.023,-6.5 0,-6.5 ; 39.1,-1.633 40.1,-1.3 ; 39.1,-0.967 40.1,-1.3 ; 40.977,-6.5 75,-6.5 ; 41.1,-1.633 40.1,-1.3 ; 41.1,-0.967 40.1,-1.3 ; 52.049,-1.3 40.1,-1.3 ; 60.051,-1.3 72,-1.3 ; 69.46,-1.3 72,-1.3 ; 72,0.6 72,38.1 ; 74,-6.833 75,-6.5 ; 74,-6.167 75,-6.5 ; 75,-7.25 75,-5.75 ; 75,-2.05 75,-0.55 ; 76,-1.633 75,-1.3 ; 76,-0.967 75,-1.3 ; 77.54,-1.3 75,-1.3 ; -4.6,3.9 -4.933,4.9 -4.6,3.9 ; -4.6,3.9 -4.267,4.9 -4.6,3.9 ; -4.6,42.7 -4.933,41.7 -4.6,42.7 ; -4.6,42.7 -4.267,41.7 -4.6,42.7 ; 3,-1.3 4,-0.967 3,-1.3 ; 3,-1.3 4,-1.633 3,-1.3 ; 72,-1.3 71,-0.967 72,-1.3 ; 72,-1.3 71,-1.633 72,-1.3 ; -5.35,3.9 -3.85,3.9 -5.35,3.9 ; -5.35,42.7 -3.85,42.7 -5.35,42.7 ; 0,0 0,46 75,46 75,0 0,0 ; 3,-2.05 3,-0.55 3,-2.05 ; 40.1,-2.05 40.1,-0.55 40.1,-2.05 ; 72,-2.05 72,-0.55 72,-2.05
  text "3.3 (mm)" at -0.953,40.97 h1 r90
  text "46 (mm)" at -6.088,19.803 h1 r90
  text "38.8 (mm)" at -3.688,19.475 h1 r90
  text "3.9 (mm)" at -0.953,-1.43 h1 r90
  text "37.1 (mm)" at 17.803,-2.212 h1
  text "31.9 (mm)" at 52.303,-2.212 h1
  text "3 (mm)" at -1.278,-4.947 h1
  text "3 (mm)" at 70.722,-4.947 h1
  text "75 (mm)" at 34.277,-7.412 h1
Mechanical 2:
  drawing of 159 lines, arcs and shapes, not listed
  text "5 (mm)" at -7.653,91.722 h1 r90
  text "46 (mm)" at -10.388,65.803 h1 r90
  text "97 (mm)" at -13.288,45.277 h1 r90
  text "41 (mm)" at -10.388,22.355 h1 r90
  text "5 (mm)" at -7.653,-0.278 h1 r90
  text "75 (mm)" at 34.277,-3.812 h1
  text "5 (mm)" at -8.278,-6.547 h1
  text "3 (mm)" at -4.278,-6.547 h1
  text "3 (mm)" at 73.722,-6.547 h1
  text "5 (mm)" at 77.722,-6.547 h1
  text "91 (mm)" at 34.355,-10.012 h1
Mechanical 5:
  lines w2.6: 67.7,45.7 67.7,41.2 ; 77.8,38.8 70.1,38.8 ; 67.7,41.2 70.1,38.8 ; 67.7,41.2 70.1,38.8
Mechanical 7:
  lines w2.6: -3.7,33.3 16.25,33.3 -3.7,33.3 ; -3.7,33.3 -5,32 -3.7,33.3
  lines w4.2: 0.6,18.3 5.6,13.3 5.6,-2.2 ; 7,37.25 -1.5,37.35 ; 7,37.35 -1.5,37.35 ; 34.5,0.6 34.5,6.7 ; -3,38.75 -1.5,37.35 ; -3,38.75 -3,43.25 -3,38.75 ; -3,38.75 -1.5,37.35
  lines w5.2: 37,10.5 37,14.7 39.5,17.2 44.5,17.2 45.4,18.1 55.9,18.1 59.8,22 62.6,24.8 75,24.8
Mechanical 8:
  lines w4.2: -0.8,15.1 27.7,15.1 ; 0.7,6.7 19.3,6.7 21.5,8.9 21.5,9.6
Drill Drawing:
  text ".legend" at -8.012,97.524 h1

## Text inside footprints (layer, text, board x,y; h text height)
*1: Drill Drawing "NPTH" at 6.7,44.45 h1.2 r90
*2: Drill Drawing "NPTH" at 75.7,44.45 h1.2 r90
*3: Drill Drawing "PTH" at 44.4,5 h1.2 r90
CN1: Bottom Overlay "1" at 61.6,38.5 h1.2 r180
CN2: Bottom Overlay "6" at 60.4,1.5 h1.5 r270; Bottom Overlay "1" at 62.1,22.6 h1.5 r90
CN4: Bottom Overlay "1" at 64.5,26.8 h1.5 r90; Bottom Overlay "2" at 63.6,32.9 h1.5 r270
U3: Top Overlay "4" at 45.05,7.3 h1 r90; Top Overlay "1" at 56.05,6.3 h1 r90; Top Overlay "3" at 56.1,7.6 h1 r90
X2: Top Overlay "4" at 26.9,29.6 h1 r270; Top Overlay "3" at 26.54,23 h1 r270; Top Overlay "2" at 24.55,23 h1 r270; Top Overlay "1" at 24.5,29.4 h1 r270